# EAGLE board LI (EAGLE 7.4.0)
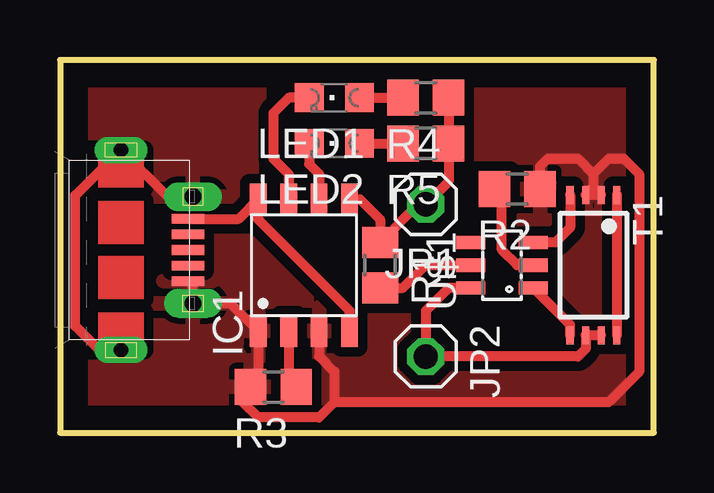
[diagram p0: board, top side]

Size 24.75 x 15.54 mm. Coordinates in mm from the lower left corner, seen from the top.
Outline: 0,0 24.75,0 24.75,15.54 0,15.54 0,0
Copper layers (1*16): Top 0.035mm / dielectric 1.5mm / Bottom 0.035mm
Design rules "default": minimum track width 10mil, minimum drill 24mil, track to track 8mil, track to pad 8mil, pad to pad 8mil, via to via 8mil, smd to smd 8mil, copper to edge 40mil, drill to drill 8mil, minimum pad ring 10mil, minimum via ring 8mil, stop-mask expansion 4mil, vias tented up to drill 0mil, thermal gap 10mil

## Footprints (pad centres in the part's own frame; a part is rotated, then mirrored left to right if it is on the bottom)
SOP-8 = smd 1.3 x 0.7: 1 -2.75,1.905; 2 -2.75,0.635; 3 -2.75,-0.635; 4 -2.75,-1.905; 5 2.75,-1.905; 6 2.75,-0.635; 7 2.75,0.635; 8 2.75,1.905
1X01 = drill 1.016 octagon: 1 0,0
CHIPLED_0805 = smd 1.2 x 1.2: A 0,-1.05; C 0,1.05
R0805 = smd 1.3 x 1.5: 1 -0.95,0; 2 0.95,0
TSSOP-8 = smd 0.3 x 0.75: 1 -0.975,-2.925; 2 -0.325,-2.925; 3 0.325,-2.925; 4 0.975,-2.925; 5 0.975,2.925; 6 0.325,2.925; 7 -0.325,2.925; 8 -0.975,2.925
SOT23-6 = smd 0.55 x 1.2: 1 -0.95,-1.3; 2 0,-1.3; 3 0.95,-1.3; 4 0.95,1.3; 5 0,1.3; 6 -0.95,1.3
47589-0001 = smd 1.35 x 0.4: 1 2.8,1.3; 2 2.8,0.65; 3 2.8,0; 4 2.8,-0.65; 5 2.8,-1.3 | drill 0.6 pad 0.95 long: CASING1 0,4.175; CASING2 0,-4.175 | drill 0.7 pad 1.1 long: CASING3 3,2.225; CASING4 3,-2.225

## Placement (x,y rotation side)
IC1  TP4056  [SOP-8]  10.16,6.99 90 top
JP1  B+  [1X01]  15.24,9.53 180 top
JP2  B-  [1X01]  15.24,3.17 270 top
LED1  [CHIPLED_0805]  11.43,13.97 90 top
LED2  [CHIPLED_0805]  11.43,12.06 90 top
R1  100  [R0805]  13.34,6.99 270 top
R2  1k  [R0805]  19.05,10.16 180 top
R3  10k  [R0805]  8.89,1.91 180 top
R4  1k  [R0805]  15.24,13.97 180 top
R5  1k  [R0805]  15.24,12.06 180 top
T1  DMN3024LSD  [TSSOP-8]  22.23,6.99 180 top
U$1  DW01A  [SOT23-6]  18.41,6.99 90 top
U$2  MICRO-USB-RECEPTACLE47589-0001  [47589-0001]  2.54,7.62 0 top

## Library data of the parts
IC1 = TP4056
JP1 JP2 = pinhead
LED1 LED2 = adafruit
R1-R5 = rcl
T1 = FS8205A
U$1 = DW01a
U$2 = con-molex-usb

## Nets
AGND: IC1.1 IC1.3 R2.1 R3.2 T1.2 T1.3 U$2.5 U$2.CASING1 U$2.CASING2 U$2.CASING3 U$2.CASING4
N$1: T1.4 U$1.3
N$2: T1.5 U$1.1
N$3: T1.1 T1.8
N$4: R2.2 U$1.2
N$5: JP2.1 T1.6 T1.7 U$1.6
N$6: R1.2 U$1.5
N$7: IC1.2 R3.1
N$8: LED1.A R4.2
N$10: LED2.A R5.2
N$11: IC1.7 LED1.C
N$12: IC1.6 LED2.C
N$13: IC1.4 IC1.8 U$2.1
VCC: IC1.5 JP1.1 R1.1 R4.1 R5.1

## Tracks (layer width: path | path; a pad name or v marks a point on that pad's centre or on a via)
AGND
  Top 0.406: T1.2 T1.3 22.23,10.23 22.23,10.79 | U$2.CASING3 4.49,9.85 U$2.CASING1 0.64,9.89 0.64,4.45 1.64,3.44 U$2.CASING2 | U$2.5 5.54,6.12 U$2.CASING4 7.09,5.39 IC1.1 8.26,2.22 R3.2 7.62,1.58 7.62,1.27 8.26,0.64 10.79,0.64 11.43,1.27 | IC1.3 10.79,3.17 11.43,2.54 11.43,1.27 | R2.1 20,11.11 20.32,11.43 21.59,11.43 22.23,10.79 | 22.23,10.79 22.86,11.43 23.5,11.43 24.13,10.79 24.13,2.54 22.86,1.27 11.43,1.27
  pour Top (isolate 0.406): 0,15.24 24.77,15.24 24.77,0 0,0
N$1
  Top 0.406: T1.4 21.25,8.55 20.64,7.93 U$1.3
N$2
  Top 0.406: T1.5 21.25,4.5 U$1.1
N$3
  Top 0.406: T1.1 T1.8
N$4
  Top 0.406: U$1.2 19.05,6.99 18.41,7.62 18.41,10.47 R2.2
N$5
  Top 0.406: T1.7 T1.6 21.9,3.48 21.59,3.17 JP2.1 15.24,5.08 16.2,6.04 U$1.6
N$6
  Top 0.406: R1.2 14.29,6.04 15.24,6.99 U$1.5
N$7
  Top 0.406: IC1.2 9.53,2.22 R3.1
N$8
  Top 0.406: LED1.A R4.2
N$10
  Top 0.406: LED2.A R5.2
N$11
  Top 0.406: LED1.C 9.53,13.97 8.89,13.34 8.89,11.43 9.53,10.79 IC1.7
N$12
  Top 0.406: LED2.C 10.38,11.21 10.79,10.79 IC1.6
N$13
  Top 0.406: U$2.1 7.44,8.92 IC1.8 8.26,8.89 12.06,5.08 IC1.4
VCC
  Top 0.406: R5.1 R4.1 16.19,10.47 JP1.1 14.93,9.53 R1.1 13.34,8.89 12.49,9.73 IC1.5